# Altium PCB PCB2.PcbDoc
Units mm, origin at the board's own origin, x right, y up, seen from the top; angles counter-clockwise.
Board outline 38.35 x 37.21 mm, 2 copper layers (Top Layer, Bottom Layer); 24 components, 23 nets, 104 pads, 13 vias.
Unrouted connection lines stored in the file: 1.
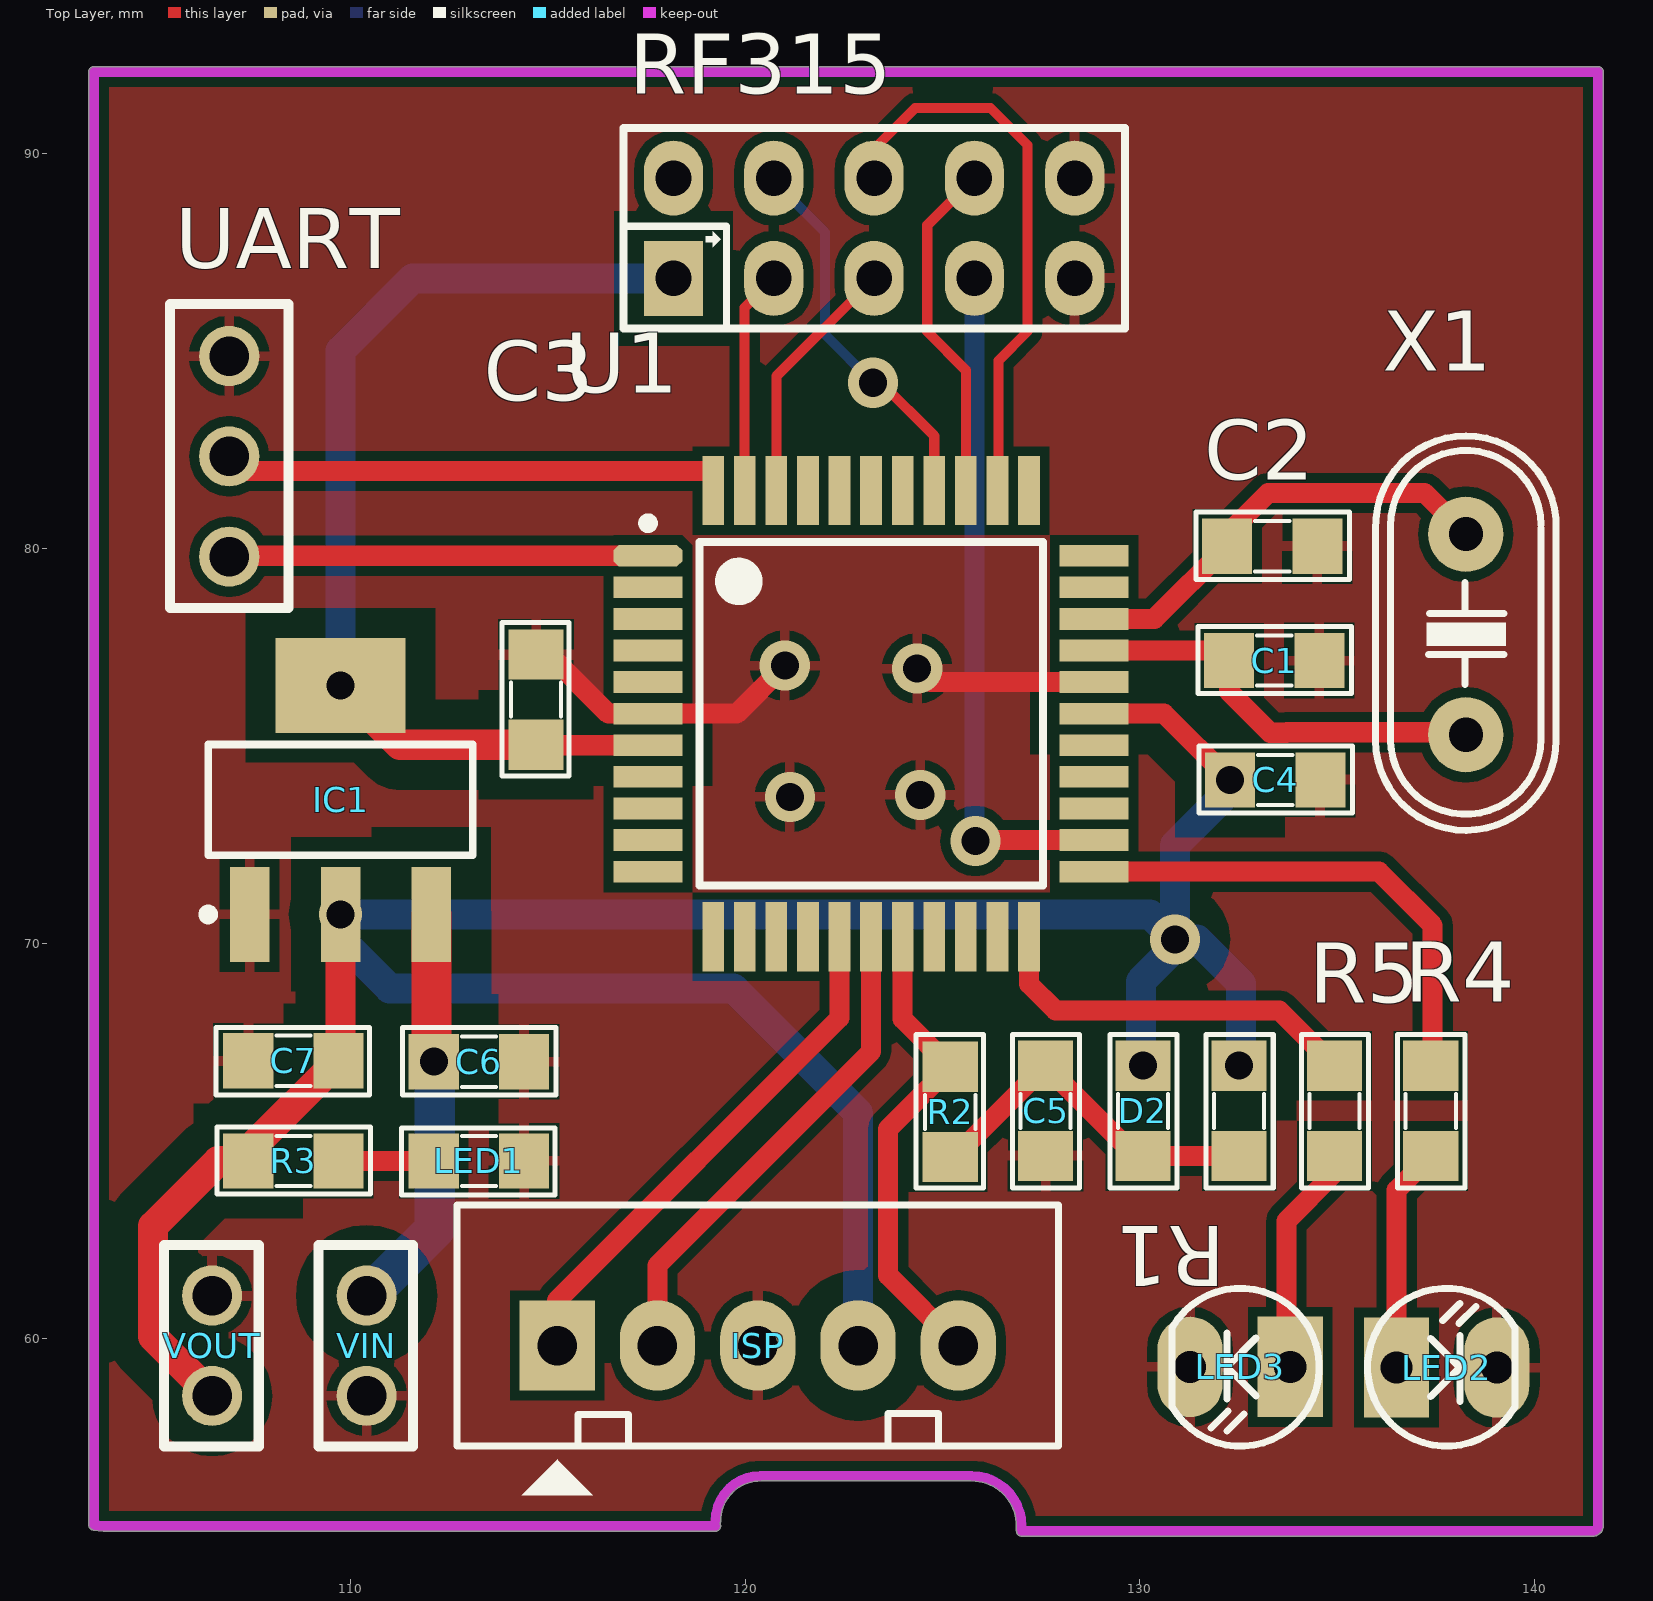
[diagram p0: Top Layer view]
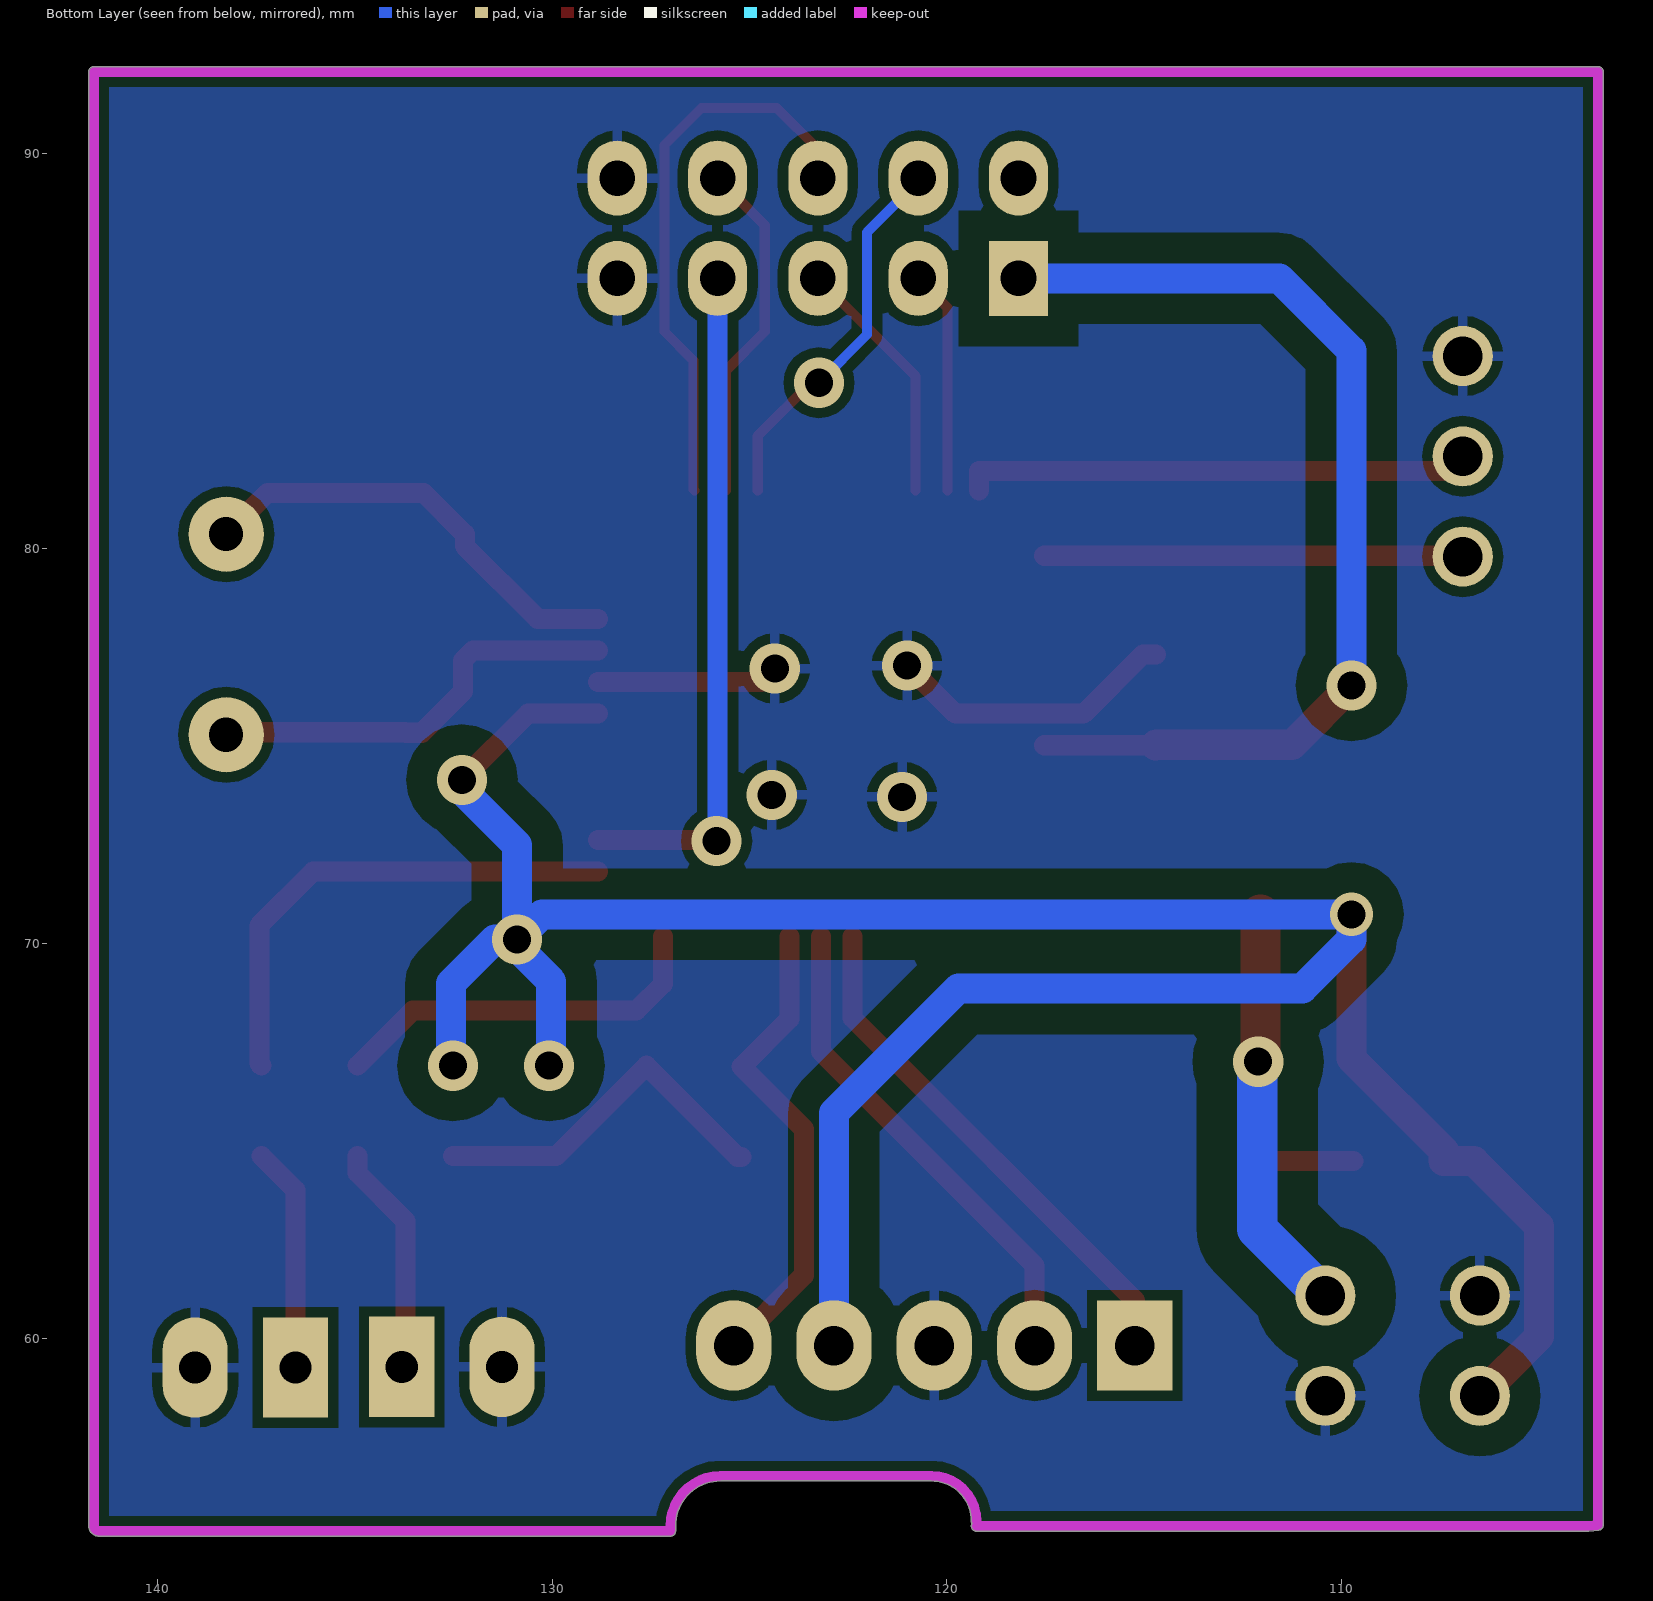
[diagram p1: Bottom Layer view, seen from below]
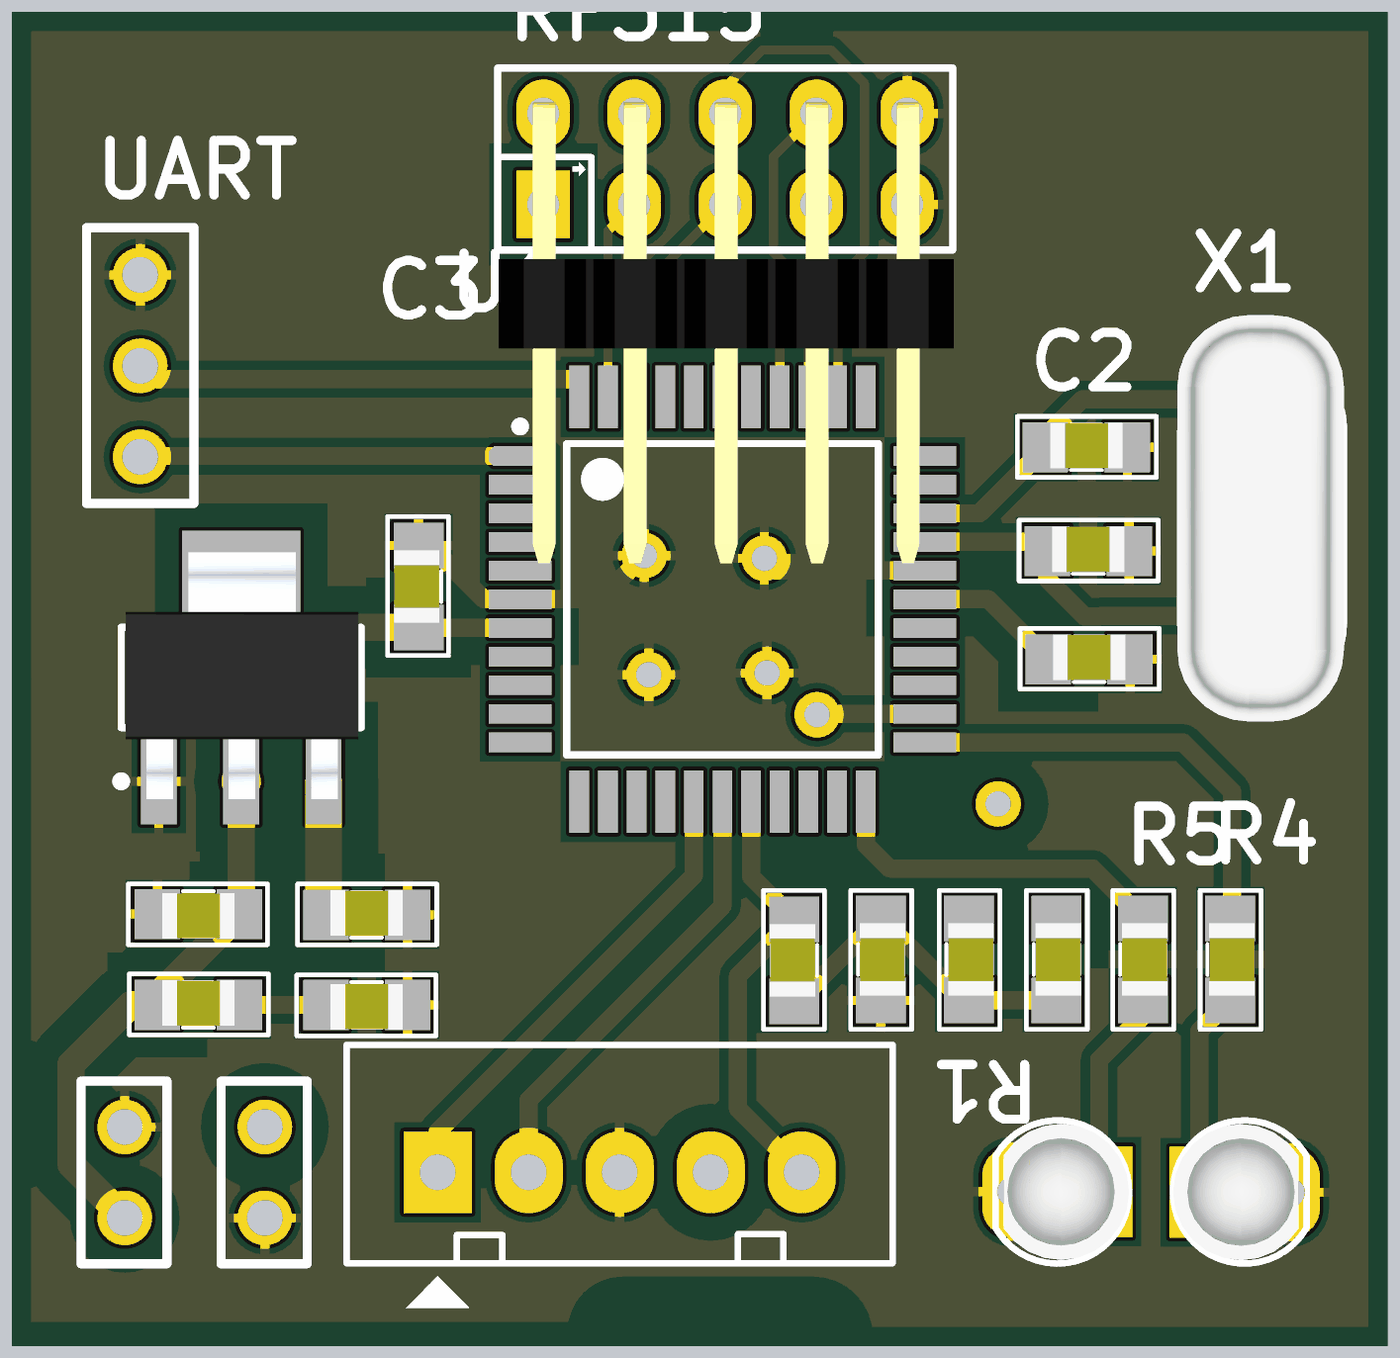
[diagram p2: 3D render of the assembled board from above, using the file's embedded part models]

## Layer stack, top to bottom
Top Layer: signal copper 0.0356
Dielectric: dielectric 0.32, FR-4, Dk 4.8
Bottom Layer: signal copper 0.0356

## Board outline
103.746,55.118 ccw(c103.759,55.245) 103.759,55.118 119.253,55.118 ccw(c119.253,55.245) 119.38,55.245 ccw(c119.253,55.245) 119.363,55.308 ccw(c119.253,55.372) 119.38,55.372 cw(c120.396,55.372) 120.396,56.388 125.73,56.388 cw(c125.73,55.245) 126.873,55.245 126.873,55.118 ccw(c127,55.118) 127,54.991 141.478,54.991 ccw(c141.478,55.245) 141.732,55.245 141.732,92.075 ccw(c141.605,92.075) 141.605,92.202 103.505,92.202 ccw(c103.505,92.075) 103.378,92.075 103.378,55.27 ccw(c103.505,55.27) 103.493,55.144 103.492,55.144 103.493,55.144

## Design rules (kind name [scope] priority, off if disabled: settings)
Clearance Clearance_2 [InNet('+3.3V')] p1: gap=0.762
Clearance Clearance_1 [InNet('12V')] p2: gap=1.016
Clearance [All] p3: gap=0.254
PlaneConnect [All] p1: planeconnectstyle=Direct reliefexpansion=0.508 reliefentries=4 reliefconductorwidth=0.254 reliefairgap=0.254
PolygonConnect [All] p1: connectstyle=Relief reliefconductorwidth=0.254 reliefentries=4 polygonreliefangle="90 Angle" airgapwidth=0.254
RoomDefinition RF2 [InComponentClass('RF2')] p1: confinementstyle=ConfineIn formatcopy=TRUE lockcomponents=FALSE outline 0,0 50.8,0 50.8,25.4 0,25.4
RoutingVias [All] p1: holewidth=0.711 width=1.27 viastyle="Through Hole" minholewidth=0.711 minwidth=1.27 maxholewidth=0.711 maxwidth=1.27
SolderMaskExpansion [All] p1: expansion=0.102
Width 3.3v [InNet('+3.3V')] p1: maxlimit=0.762 minlimit=0.762 preferedwidth=0.762
Width 12v [InNet('12V')] p2: maxlimit=1.016 minlimit=1.016 preferedwidth=1.016
Width [All] p3: maxlimit=0.508 minlimit=0.508 preferedwidth=0.508
27 further rules are at their usual default settings.

## Components (designator, comment, footprint, x,y, rotation, side; value= is the part's Value field where it differs from the comment)
C1 "103" SM-0805 133.401,77.165 r180 top
C2 "103" SM-0805 133.35,80.061 r180 top
C3 "103" SM-0805 114.706,76.175 r270 top
C4 "103" SM-0805 133.426,74.143 r180 top
C5 "103" SM-0805 127.61,65.761 r90 top
C6 "103" SM-0805 113.259,67.005 r180 top
C7 "103" SM-0805 108.56,67.031 r0 top
D2 "1N4007" SM-0805 130.073,65.761 r90 top
IC1 "LM1117" SOT223-4N 109.753,73.635 r90 top
ISP "JP5" CON5 115.24,59.817 r0 top
LED1 "LED" SM-0805 113.259,64.491 r0 top
LED2 "LED" LED-3 136.5,59.258 r0 top
LED3 "LED" LED-3 133.807,59.276 r180 top
R1 "1k" SM-0805 132.512,65.761 r90 top
R2 "1k" SM-0805 125.197,65.735 r270 top
R3 "1k" SM-0805 108.56,64.491 r180 top
R4 "1k" SM-0805 137.363,65.761 r90 top
R5 "1k" SM-0805 134.925,65.761 r90 top
RF315 "Header 5x2" HED2X5_cen 118.186,86.843 r0 top
U1 "PIC18F46K20T-I/PT" TQFP-PT44_N 123.19,75.819 r0 top
UART "JP3" CON3 106.934,82.296 r90 top
VIN "JP2" CON2 110.414,59.842 r90 top
VOUT "JP2" CON2 106.502,59.842 r90 top
X1 "4Mhz" XT2 138.252,77.826 r270 top

## Footprints (in the part's own frame and the unit in brackets; to place one, negate y for a bottom-side part, rotate by r counter-clockwise, add the part's x,y. Pads: shape width x height; smd on the part's side, far side on the other; paste and mask are expansions set on the pad)
CON2 [mm] "2-Pin Connector; pitch 2.54mm"
  round 1.524 hole 1: 1(-1.3,0) 2(1.24,0)
  silkscreen extent -2.58,-1.18 2.52,1.22
CON3 [mm] "3-Pin Connector; pitch 2.54mm"
  round 1.524 hole 1: 1(-2.5,0) 2(0.04,0) 3(2.58,0)
  silkscreen extent -3.8,-1.5 3.9,1.5
CON5 [mm] "CON5"
  rect 1.905x2.286 hole 1: 1(0,0)
  oval 1.905x2.286 hole 1: 2(2.54,0) 3(5.08,0) 4(7.62,0) 5(10.16,0)
  silkscreen extent -2.54,-3.8 12.7,3.56, body extent -2.63,-2.7 12.83,3.7, height 7
HED2X5_cen [mm] "Connector; Header; 5x2 Position"
  rect 1.5x1.9 hole 0.9: 1(0,0)
  oval 1.5x1.9 hole 0.9: 2(2.54,0) 3(5.08,0) 4(7.62,0) 5(10.16,0) 6(0,2.54) 7(2.54,2.54) 8(5.08,2.54) 9(7.62,2.54) 10(10.16,2.54)
  silkscreen extent -1.27,-1.27 11.43,3.81, body extent -1.24,-10.02 11.46,2.86, height 5.02
LED-3 [mil] "LED 2 PIN, 3ly Only colour"
  rect 65x100 hole 32: 1(0,0)
  oval 65x100 hole 32: 2(100,0)
  silkscreen extent -29,-78 118,79, body extent -29,-75 109,75, height 256
SM-0805 [mil] "Compoment SMD 80x50mil"
  rect 50x55 smd: 1(-45,0) 2(45,0)
  silkscreen extent -77,-34 76,33, body extent -40,-27 40,23, height 24
SOT223-4N [mm] "SOT223, 4-Leads, Body 6.5x3.5mm, Pitch 2.3mm, Lead Span 7mm, IPC Medium Density"
  rect 2.4x1 smd: 1(-2.9,2.3) 2(-2.9,0) 3(-2.9,-2.3)
  rect 2.4x3.3 smd: 4(2.9,0)
  silkscreen extent -3.02,-3.35 1.4,3.47, body extent -3.39,-3.27 3.5,3.23, height 1.72
TQFP-PT44_N [mm] "Thin QFP, 44-Leads, Body 10x10mm, Pitch 0.8mm, IPC Medium Density"
  oct 1.75x0.55 smd: 1(-5.65,4)
  rect 1.75x0.55 smd: 2(-5.65,3.2) 3(-5.65,2.4) 4(-5.65,1.6) 5(-5.65,0.8) 6(-5.65,0) 7(-5.65,-0.8) 8(-5.65,-1.6) 9(-5.65,-2.4) 10(-5.65,-3.2) 11(-5.65,-4) 23(5.65,-4) 24(5.65,-3.2) 25(5.65,-2.4) 26(5.65,-1.6) 27(5.65,-0.8) 28(5.65,0) 29(5.65,0.8) 30(5.65,1.6) 31(5.65,2.4) 32(5.65,3.2) 33(5.65,4)
  rect 0.55x1.75 smd: 12(-4,-5.65) 13(-3.2,-5.65) 14(-2.4,-5.65) 15(-1.6,-5.65) 16(-0.8,-5.65) 17(0,-5.65) 18(0.8,-5.65) 19(1.6,-5.65) 20(2.4,-5.65) 21(3.2,-5.65) 22(4,-5.65) 34(4,5.65) 35(3.2,5.65) 36(2.4,5.65) 37(1.6,5.65) 38(0.8,5.65) 39(0,5.65) 40(-0.8,5.65) 41(-1.6,5.65) 42(-2.4,5.65) 43(-3.2,5.65) 44(-4,5.65)
  silkscreen extent -5.77,-4.35 4.35,4.95, body extent -5,-5 5,5, height 1.2
XT2 [mil] "Footpin for Crystal 2 pin"
  round 75 hole 34: 1(-100,0) 2(100,0)
  silkscreen extent -198,-90 195,90, body extent -233,-93 213,90, height 138

## Part data
C1 C2 C3 C4 C5 C6 C7: library part CM, "Cap SMD"
D2: library part D1A, "Diode 1A"
IC1: "3v3"
ISP: library part Con5, "Connector 5"
LED1 LED2 LED3: "LED Single colour Green and Red"
R1 R2 R3 R4 R5: library part R, "Resistor 1/4W"
RF315: library part HED5x2
U1: "Flash Microcontroller with 10-Bit A/D and nanoWatt Technology, 32K Flash, 44-Pin TQFP, Industrial Temperature Range, Tape and Reel"
UART: library part Con3, "Connector 3"
VIN VOUT: library part Con2, "Connector 2"
X1: library part XT2, "Crystal For all Crystal 2pin."

## Via types
v1: diameter 1.27, hole 0.711, Top Layer to Bottom Layer, 12 vias
v2: diameter 1.1, hole 0.711, Top Layer to Bottom Layer, 1 vias

## Nets (pads, with @x,y where several pads share a name; then routed paths per layer and width w, separated by ;. In a path a pad name is that pad's centre, name@x,y a point inside that pad or via, vN(x,y) a via of type N, cw(c..) or ccw(c..) an arc to the next point about the centre after c; other vN are vias at no path point)
12V: C6.2 IC1.3 VIN.2 | length 10.4
  Top Layer w1.016: IC1.3 112.053,67.067 v1(112.116,67.005)
  Bottom Layer w1.016: VIN.2 110.46,61.082 112.141,62.763 112.141,66.98 v1(112.116,67.005)
+3.3V: C3.2 C4.2 C7.2 D2.2 IC1.2 IC1.4 ISP.4 R1.2 R3.2 RF315.1 U1.7 U1.28 VOUT.1 | length 100.7
  Top Layer w0.508: C3.2@114.719,75.019 U1.7 ; U1.28 130.607,75.819 v1(132.283,74.143)
  Top Layer w0.762: VOUT.1 105.004,60.041 105.004,62.84 106.655,64.491 R3.2 107.417,64.745 C7.2 109.753,67.081 v2(109.753,70.735) ; v1(109.753,76.535) 111.256,75.032 C3.2 C3.2@114.719,75.019
  Bottom Layer w0.762: v1(109.753,76.535) 109.753,85.014 111.582,86.843 RF315.1 ; ISP.4 122.86,65.71 119.71,68.859 110.998,68.859 109.753,70.104 v2(109.753,70.735) 130.256,70.735 v1(130.886,70.104) ; v1(130.073,66.904) 130.023,66.954 130.023,69.037 130.886,69.901 v1(130.886,70.104) ; v1(132.283,74.143) 132.283,73.889 130.886,72.492 v1(130.886,70.104) ; v1(132.512,66.904) 132.563,66.954 132.563,68.986 131.445,70.104 v1(130.886,70.104)
CSN: RF315.4 U1.24 | length 17.3
  Top Layer w0.508: v1(125.832,72.593) 125.857,72.619 U1.24
  Bottom Layer w0.508: RF315.4 125.806,72.619 v1(125.832,72.593)
GD02: RF315.8 U1.35 | length 14.5
  Top Layer w0.254: RF315.8 123.266,90.119 124.308,91.161 126.213,91.161 127.152,90.221 127.152,85.496 126.416,84.76 126.416,81.495 U1.35
GDO0: RF315.9 U1.36 | length 8.8
  Top Layer w0.254: U1.36 125.59,84.519 124.612,85.496 124.612,88.189 RF315.9
GND: C1.1 C2.1 C3.1 C4.1 C5.1 C6.1 C7.1 IC1.1 ISP.3 LED1.2 LED2.2 LED3.2 RF315.5 RF315.10 U1.6 U1.29 UART.3 VIN.1 VOUT.2 | length 12
  Top Layer w0.508: C3.1 115.037,77.318 116.535,75.819 U1.6 119.786,75.819 v1(121.006,77.038) ; v1(124.358,76.962) 124.701,76.619 U1.29
  other v1: 121.133,73.711 124.435,73.762
LED1: R4.2 U1.23 | length 12.7
  Top Layer w0.508: U1.23 136.055,71.819 137.414,70.46 137.414,66.954 R4.2
LED2: R5.2 U1.22 | length 9.8
  Top Layer w0.508: U1.22 127.19,68.974 127.864,68.301 133.528,68.301 R5.2
MCLR: ISP.5 R2.1 U1.18 | length 12.2
  Top Layer w0.508: U1.18 123.99,68.085 R2.1 123.622,65.303 123.622,61.595 ISP.5
MISO: RF315.3 U1.42 | length 6.4
  Top Layer w0.254: U1.42 120.79,84.366 RF315.3
MOSI: RF315.2 U1.43 | length 5.7
  Top Layer w0.254: U1.43 119.99,86.106 RF315.2
NC: RF315.6
NetC5_2: C5.2 D2.1 R1.1 R2.2 | length 9.2
  Top Layer w0.508: R2.2 125.298,64.592 C5.2 129.896,64.618 D2.1 R1.1
NetLED1_1: LED1.1 R3.1 | length 2.4
  Top Layer w0.508: R3.1 LED1.1
NetLED2_1: LED2.1 R4.1 | length 5.7
  Top Layer w0.508: LED2.1 136.5,63.754 R4.1
NetLED3_1: LED3.1 R5.1 | length 5.9
  Top Layer w0.508: LED3.1 133.706,59.378 133.706,62.967 134.925,64.186 R5.1
OSC1: C1.2 U1.30 X1.2 | length 10.8
  Top Layer w0.508: U1.30 132.004,77.419 C1.2 132.258,76.378 133.299,75.336 133.711,75.336 133.724,75.349 138.189,75.349 X1.2
OSC2: C2.2 U1.31 X1.1 | length 11.3
  Top Layer w0.508: U1.31 130.365,78.219 C2.2 132.207,80.366 133.248,81.407 137.211,81.407 X1.1
PGC: ISP.1 U1.16 | length 13.3
  Top Layer w0.508: ISP.1 115.24,60.96 122.39,68.11 U1.16
PGD: ISP.2 U1.17 | length 12.6
  Top Layer w0.508: ISP.2 117.78,61.849 123.19,67.259 U1.17
RX: U1.1 UART.1 | length 10.6
  Top Layer w0.508: UART.1 106.957,79.819 U1.1
SCK: RF315.7 U1.37 | length 9.7
  Top Layer w0.254: v1(123.241,84.201) 123.444,84.201 124.79,82.855 U1.37
  Bottom Layer w0.254: RF315.7 120.726,89.306 122.022,88.011 122.022,85.42 v1(123.241,84.201)
TX: U1.44 UART.2 | length 12.9
  Top Layer w0.508: UART.2 107.304,81.966 119.19,81.966 U1.44
pads on no net: U1.2 U1.3 U1.4 U1.5 U1.8 U1.9 U1.10 U1.11 U1.12 U1.13 U1.14 U1.15 U1.19 U1.20 U1.21 U1.25 U1.26 U1.27 U1.32 U1.33 U1.34 U1.38 U1.39 U1.40 U1.41

## Polygon pours and split planes (outlines as drawn)
GND on Top Layer "Top Layer-No Net" (solid, remove dead copper, pour order 4): 141.605,55.245 141.605,92.075 103.505,92.075 103.505,55.194 103.556,55.245 119.253,55.245 119.253,55.372 cw(c120.396,55.372) 120.396,56.515 125.73,56.515 126.009,56.49 126.594,56.21 126.949,55.677 127,55.118 141.478,55.118
GND on Bottom Layer "Top Layer-No Net" (solid, remove dead copper, pour order 4): 103.505,92.075 141.605,92.075 141.605,55.245 141.478,55.118 127,55.118 127,55.245 ccw(c125.73,55.245) 125.73,56.515 120.396,56.515 119.583,56.261 119.253,55.372 119.253,55.245 103.505,55.27 103.505,92.075

## Keep-outs
Keep-Out Layer:
  lines w0.254: 119.253,55.245 103.759,55.245 103.505,55.27 103.505,92.075 141.605,92.075 141.605,55.245 cw(c141.478,55.245) 141.478,55.118 127,55.118 127,55.245 ccw(c125.73,55.245) 125.73,56.515 124.46,56.515 120.777,56.515 120.396,56.515 ccw(c120.396,55.372) 119.253,55.372